# EAGLE board wifi-test-middle (EAGLE 6.2)
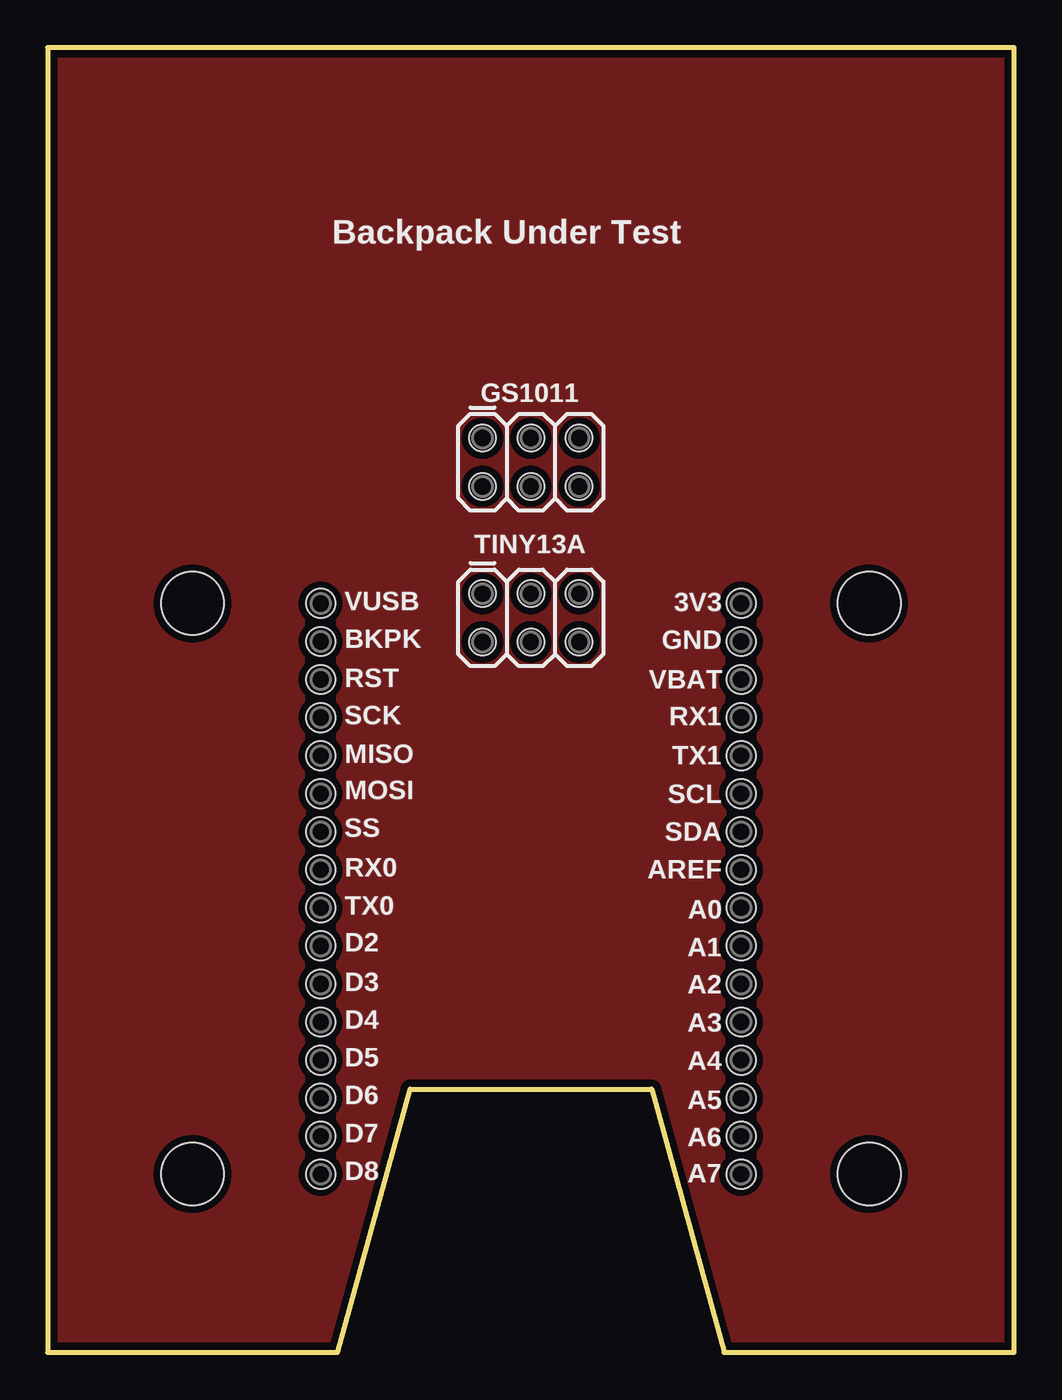
[diagram p0: board, top side]
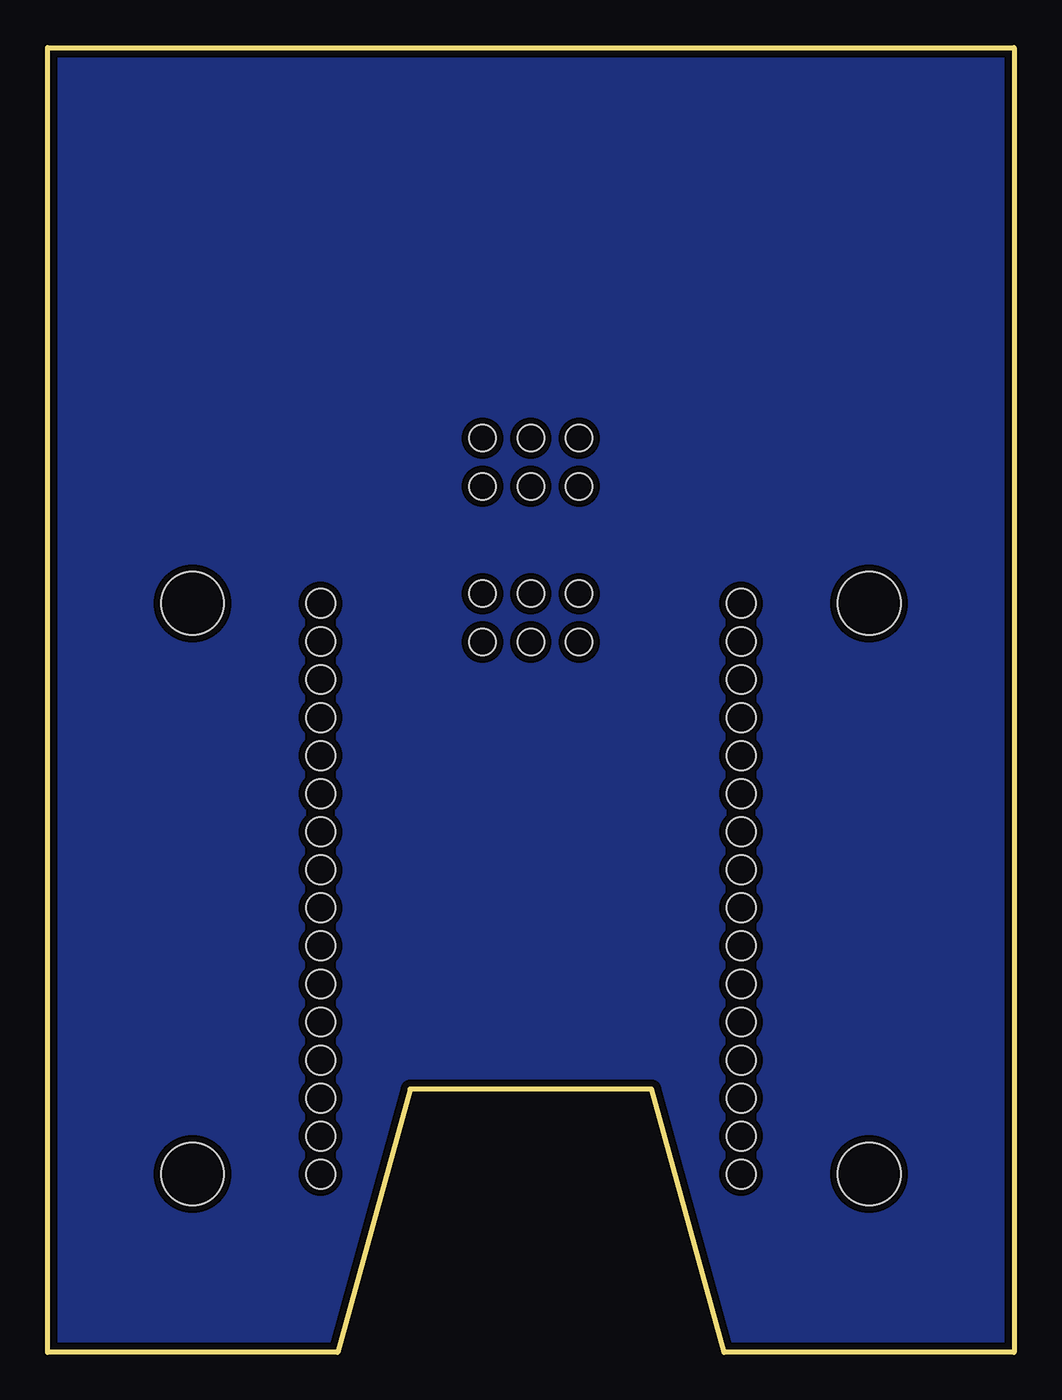
[diagram p1: board, bottom side, seen from below]

Size 50.8 x 68.58 mm. Coordinates in mm from the lower left corner, seen from the top.
Outline: 0,0 15.24,0 19.05,13.84 31.75,13.84 35.56,0 50.8,0 50.8,68.58 0,68.58 0,0
Copper layers (1*16): Top 0.0356mm / dielectric 1.5011mm / Bottom 0.0356mm
Design rules: minimum track width 6mil, minimum drill 13mil, track to track 6mil, track to pad 6mil, pad to pad 6mil, via to via 6mil, smd to smd 6mil, copper to edge 15mil, drill to drill 6mil, minimum pad ring 7mil, minimum via ring 7mil, stop-mask expansion 4mil, vias tented up to drill 16mil, thermal gap 10mil
Net classes: 0 Default: width 0.203 mm; 1 VCC: width 0.305 mm; 2 LEDPower: width 0.203 mm; 3 ButtonSignal: width 0.203 mm; 4 RF Antenna: width 0.305 mm; 5 GND: width 0.203 mm

## Footprints (pad centres in the part's own frame; a part is rotated, then mirrored left to right if it is on the bottom)
1X16_2MM_POGO-HOLES-06 = hole 1.524: 0.005,0; 2.005,0; 4.005,0; 6.005,0; 8.005,0; 10.005,0; 12.005,0; 14.005,0; 16.005,0; 18.005,0; 20.005,0; 22.005,0; 24.005,0; 26.005,0; 28.005,0; 30.005,0
1X1_2MM_POGO-HOLES_055 = hole 1.397: 0,0
STAND-OFF = hole 3.302: 0,0

## Placement (x,y rotation side)
E$1  [1X16_2MM_POGO-HOLES-06]  14.35,39.37 270 top
E$2  [1X16_2MM_POGO-HOLES-06]  36.45,39.37 270 top
E$3  [1X1_2MM_POGO-HOLES_055]  22.86,39.88 0 top
E$4  [1X1_2MM_POGO-HOLES_055]  25.4,39.88 0 top
E$5  [1X1_2MM_POGO-HOLES_055]  27.94,39.88 0 top
E$6  [1X1_2MM_POGO-HOLES_055]  27.94,37.34 0 top
E$7  [1X1_2MM_POGO-HOLES_055]  25.4,37.34 0 top
E$8  [1X1_2MM_POGO-HOLES_055]  22.86,37.34 0 top
E$11  [1X1_2MM_POGO-HOLES_055]  22.86,48.06 0 top
E$12  [1X1_2MM_POGO-HOLES_055]  25.4,48.06 0 top
E$13  [1X1_2MM_POGO-HOLES_055]  27.94,48.06 0 top
E$14  [1X1_2MM_POGO-HOLES_055]  27.94,45.52 0 top
E$15  [1X1_2MM_POGO-HOLES_055]  25.4,45.52 0 top
E$16  [1X1_2MM_POGO-HOLES_055]  22.86,45.52 0 top
JP7  STAND-OFF  [STAND-OFF]  43.18,39.37 0 top
JP8  STAND-OFF  [STAND-OFF]  7.62,39.37 0 top
JP9  STAND-OFF  [STAND-OFF]  7.62,9.37 0 top
JP10  STAND-OFF  [STAND-OFF]  43.18,9.37 0 top

## Library data of the parts
E$1-E$8 E$11-E$16 JP7-JP10 = Pinoccio

## Tracks (layer width: path | path; a pad name or v marks a point on that pad's centre or on a via)
S$2
  pour Top: 0.23,68.45 50.57,68.45 50.57,0.33 35.61,0.33 35.61,0.13 31.88,14.05 19.05,14.05 15.11,0.13 0.3,0.13 0.3,68.4
S$3
  pour Bottom: 0.3,68.33 50.75,68.4 50.57,0.2 35.61,0.33 31.95,13.89 19.05,13.89 15.16,0.2 0.1,0.25

## Text on the board
tPlace: Backpack Under Test | GS1011 | TINY13A | 3V3 | VUSB | GND | BKPK | VBAT | RST | RX1 | SCK | TX1 | MISO | SCL | MOSI | SDA | SS | AREF | RX0 | A0 | TX0 | A1 | D2 | A2 | D3 | A3 | D4 | A4 | D5 | A5 | D6 | A6 | D7 | A7 | D8
tDocu: Pinoccio(tm) Wi-Fi Test Jig - Middle v1.1 | Design by: Eric Jennings for Pinoccio | http://pinocc.io | Licensed under CERN OHL v.1.1